# Altium PCB LEDMatrix.PcbDoc
Units mil, origin at the board's own origin, x right, y up, seen from the top; angles counter-clockwise.
Board outline 6710 x 1575.53 mil, 2 copper layers (Top Layer, Bottom Layer); 42 components, 138 nets, 415 pads, 163 vias.
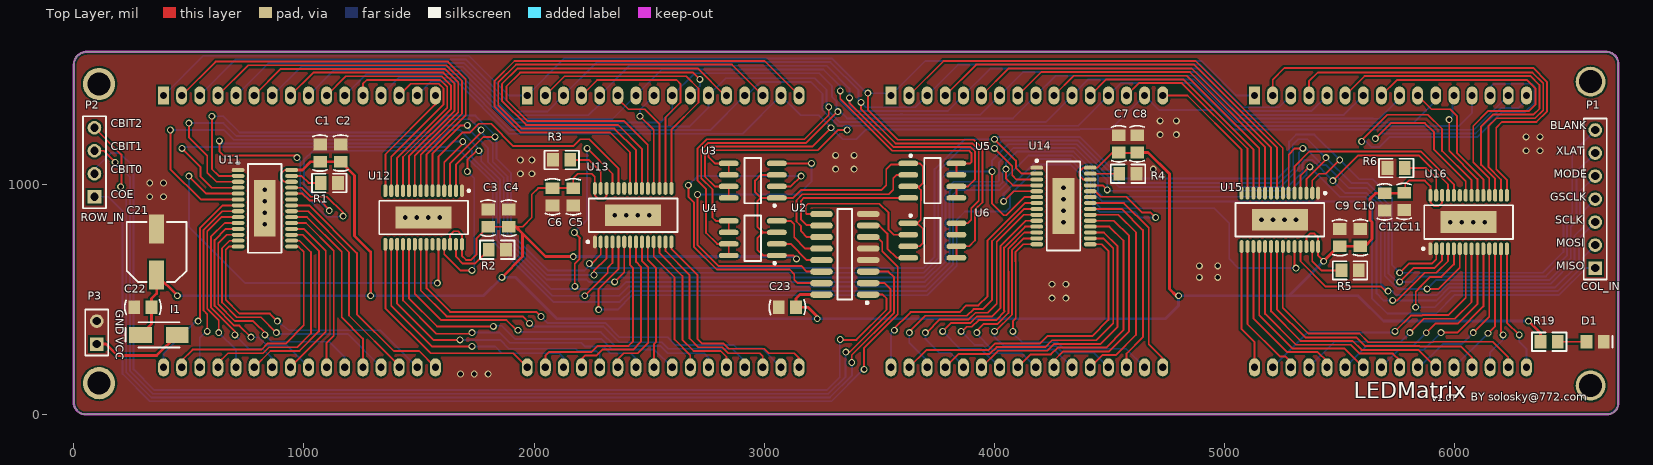
[diagram p0: Top Layer view]
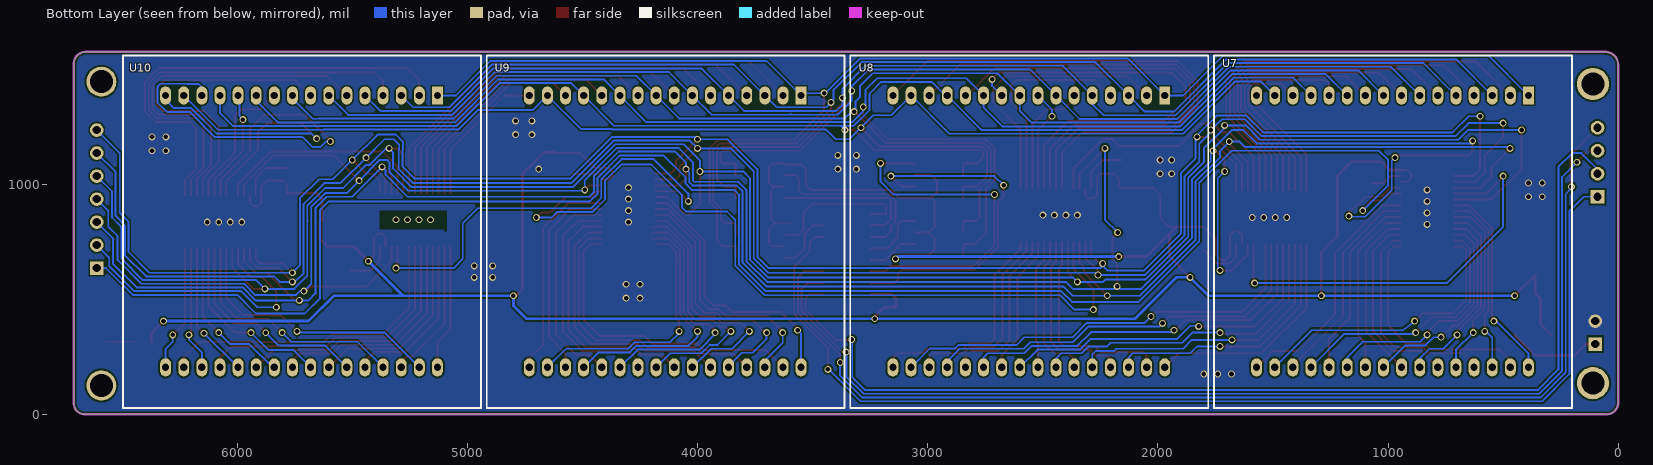
[diagram p1: Bottom Layer view, seen from below]
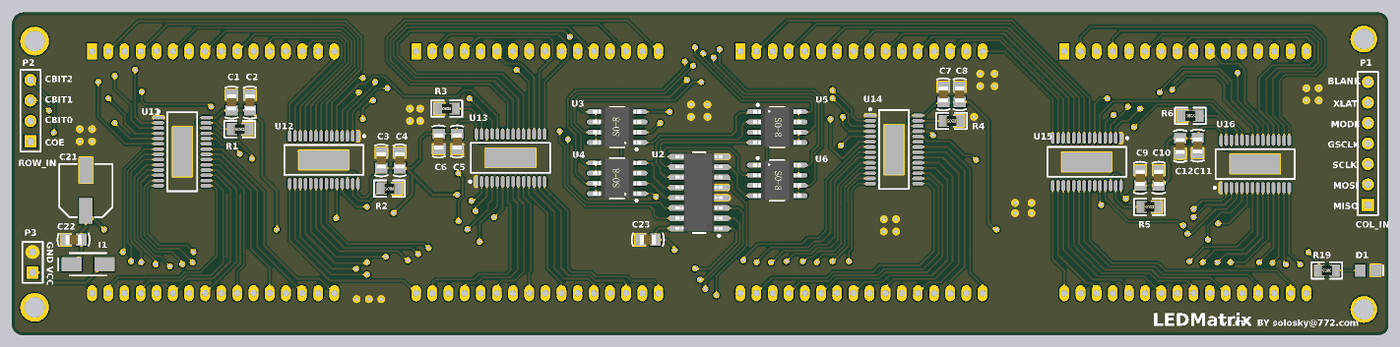
[diagram p2: 3D render of the assembled board from above, using the file's embedded part models]

## Layer stack, top to bottom
Top Solder: solder mask 0.4, Solder Resist, Dk 3.5
Top Layer: signal copper 1.4
Dielectric 1: dielectric 12.6, FR-4, Dk 4.8
Bottom Layer: signal copper 1.4
Bottom Solder: solder mask 0.4, Solder Resist, Dk 3.5

## Board outline
60,0 cw(c52.5,52.5) 0,45 0,1520 cw(c57.5,1517.5) 60,1575 6660,1575 cw(c6657.5,1522.5) 6710,1520 6710,45 cw(c6662.5,47.5) 6660,0

## Design rules (kind name [scope] priority, off if disabled: settings)
Clearance [All] p1: gap=8 except(7: SMDPad-SMDPad)
MinimumSolderMaskSliver [All] p1: minsoldermaskwidth=1
PolygonConnect [All] p1: connectstyle=Direct reliefconductorwidth=10 reliefentries=4 polygonreliefangle="90 Angle" airgapwidth=10
RoutingVias [All] p1: holewidth=20 width=30 viastyle="Through Hole" minholewidth=20 minwidth=30 maxholewidth=20 maxwidth=30
SilkToSilkClearance [All] p1: silktosilkclearance=6
SilkToSolderMaskClearance [IsPad] p1: minsilkscreentomaskgap=5 clearancetoexposedcopper=TRUE
SolderMaskExpansion [All] p1: expansion=4
UnpouredPolygon [All] p1: allowunpoured=FALSE
Width [All] p1: maxlimit=12 minlimit=8 preferedwidth=8
26 further rules are at their usual default settings.

## Components (designator, comment, footprint, x,y, rotation, side; value= is the part's Value field where it differs from the comment)
C1 "Cap" C-0805 1070,1135 r270 top
C2 "Cap" C-0805 1160,1135 r270 top
C3 "Cap" C-0805 1800,852.4 r270 top
C4 "Cap" C-0805 1890,852.4 r270 top
C5 "Cap" C-0805 2170,945 r90 top
C6 "Cap" C-0805 2080,945 r90 top
C7 "Cap" C-0805 4540,1175 r270 top
C8 "Cap" C-0805 4620,1175 r270 top
C9 "Cap" C-0805 5500,767.4 r270 top
C10 "Cap" C-0805 5590,767.4 r270 top
C11 "Cap" C-0805 5780,925 r90 top
C12 "Cap" C-0805 5695,922.6 r90 top
C21 "Cap Pol2" CAPAE-D 360,705 r90 top
C22 "Cap" C-0805 300,465 r180 top
C23 "Cap" C-0805 3100,465 r180 top
D1 "LED2" LED-0805 6610,315 r0 top
I1 "Diode" D-SMA 370,345 r180 top
P1 "COL_IN" HDR1X7 6610,635 r90 top locked
P2 "ROW_IN" HDR1X4 90,945 r90 top locked
P3 "PW_IN" HDR1X2 100,305 r90 top
R1 "Res2" 0805-1 1110,1005 r180 top
R2 "Res2" 0805-1 1840,715 r180 top
R3 "Res2" 0805-1 2120,1105 r0 top
R4 "Res2" 0805-1 4580,1045 r180 top
R5 "Res2" 0805-1 5545,625 r180 top
R6 "Res2" 0805-1 5745,1070 r0 top
R19 "Res2" 0805-1 6410,315 r180 top
U2 "SN74HC138D" SOIC-16 3350,695 r180 top
U3 "APM4953" SOIC-8 2950,1015 r180 top
U4 "APM4953" SOIC-8 2950,765 r180 top
U5 "APM4953" SOIC-8 3730,1015 r0 top
U6 "APM4953" SOIC-8 3730,755 r0 top
U7 "LEDARRAY_RGB" DIP32 390,1385 r270 bottom locked
U8 "LEDARRAY_RGB" DIP32 1970,1385 r270 bottom locked
U9 "LEDARRAY_RGB" DIP32 3550,1385 r270 bottom locked
U10 "LEDARRAY_RGB" DIP32 5130,1385 r270 bottom locked
U11 "TLC5941" TSOP28_N 830,895 r0 top
U12 "TLC5941" TSOP28_N 1520,855 r270 top
U13 "TLC5941" TSOP28_N 2430,865 r90 top
U14 "TLC5941" TSOP28_N 4300,905 r0 top
U15 "TLC5941" TSOP28_N 5240,845 r270 top
U16 "TLC5941" TSOP28_N 6060,835 r90 top

## Footprints (in the part's own frame and the unit in brackets; to place one, negate y for a bottom-side part, rotate by r counter-clockwise, add the part's x,y. Pads: shape width x height; smd on the part's side, far side on the other; paste and mask are expansions set on the pad)
0805-1 [mm] "0805带丝印"
  rect 1.3x1.5 smd: 1(-0.95,0) 2(0.95,0)
  silkscreen extent -1.91,-1.02 1.91,1.02, body extent -1,-0.62 1,0.63, height 0.5
C-0805 [mm] "贴片电容"
  rect 1.3x1.5 smd: 1(-0.95,0) 2(0.95,0)
  silkscreen extent -2,-0.79 2,0.79, body extent -1,-0.6 1,0.6, height 0.95
CAPAE-D [mm] "Aluminum Electrolytic Capacitor, Body 6.60x6.60x5.50mm, IPC Medium Density"
  rect 3.2x1.65 smd: 1(-2.525,0) 2(2.525,0)
  silkscreen extent -3.3,-3.3 3.3,3.3, body extent -3.3,-3.3 3.3,3.3, height 5.5
D-SMA [mm] "贴片二极管"
  rect 2.5x1.75 smd: 1(-2.032,0) 2(2.032,0)
  silkscreen extent -2.29,-1.4 3.68,1.4
DIP32 [mm]
  rect 2x1.2 hole 0.8: 1(0,0)
  oval 2x1.2 hole 0.8: 2(0,-2) 3(0,-4) 4(0,-6) 5(0,-8) 6(0,-10) 7(0,-12) 8(0,-14) 9(0,-16) 10(0,-18) 11(0,-20) 12(0,-22) 13(0,-24) 14(0,-26) 15(0,-28) 16(0,-30) 17(30,-30) 18(30,-28) 19(30,-26) 20(30,-24) 21(30,-22) 22(30,-20) 23(30,-18) 24(30,-16) 25(30,-14) 26(30,-12) 27(30,-10) 28(30,-8) 29(30,-6) 30(30,-4) 31(30,-2) 32(30,0)
  silkscreen extent -4.4,-34.7 34.5,4.8
HDR1X2 [mm] "Connector; Header; 2 Position"
  rect 1.5x1.5 hole 0.9: 1(0,0)
  round 1.5 hole 0.9: 2(2.54,0)
  silkscreen extent -1.27,-1.27 3.81,1.27
HDR1X4 [mm] "Connector; Header; 4 Position"
  rect 1.5x1.5 hole 0.9: 1(0,0)
  round 1.5 hole 0.9: 2(2.54,0) 3(5.08,0) 4(7.62,0)
  silkscreen extent -1.27,-1.27 8.89,1.27
HDR1X7 [mm] "Connector; Header; 7 Position"
  rect 1.5x1.5 hole 0.9: 1(0,0)
  round 1.5 hole 0.9: 2(2.54,0) 3(5.08,0) 4(7.62,0) 5(10.16,0) 6(12.7,0) 7(15.24,0)
  silkscreen extent -1.27,-1.27 16.51,1.27
LED-0805 [mm] "贴片LED"
  rect 1.3x1.5 smd: 1(-0.95,0) 2(0.95,0)
  silkscreen extent 1.91,-0.64 1.91,0.64
SOIC-8 [mm]
  oval 2.2x0.6 smd: 1(-2.654,1.905) 2(-2.654,0.635) 3(-2.654,-0.635) 4(-2.654,-1.905) 5(2.654,-1.905) 6(2.654,-0.635) 7(2.654,0.635) 8(2.654,1.905)
  silkscreen extent -2.53,-2.5 0.9,2.88, body extent -3,-2.45 3,2.45, height 1.7
SOIC-16 [mm]
  oval 2.5x0.7 smd: 1(-2.577,4.445) 2(-2.577,3.175) 3(-2.577,1.905) 4(-2.577,0.635) 5(-2.577,-0.635) 6(-2.577,-1.905) 7(-2.577,-3.175) 8(-2.577,-4.445) 9(2.577,-4.445) 10(2.577,-3.175) 11(2.577,-1.905) 12(2.577,-0.635) 13(2.577,0.635) 14(2.577,1.905) 15(2.577,3.175) 16(2.577,4.445)
  silkscreen extent -2.58,-5 0.8,5.47, body extent -2.88,-4.92 2.92,4.88, height 1.75
TSOP28_N [mm] "TSOP, 28-Leads, Body 9.70x4.40mm, Pitch 0.65mm, Thermal Pad 6.20x2.40mm, IPC Medium Density"
  oval 1.4x0.45 smd: 1(-2.95,4.225) 2(-2.95,3.575) 3(-2.95,2.925) 4(-2.95,2.275) 5(-2.95,1.625) 6(-2.95,0.975) 7(-2.95,0.325) 8(-2.95,-0.325) 9(-2.95,-0.975) 10(-2.95,-1.625) 11(-2.95,-2.275) 12(-2.95,-2.925) 13(-2.95,-3.575) 14(-2.95,-4.225) 15(2.95,-4.225) 16(2.95,-3.575) 17(2.95,-2.925) 18(2.95,-2.275) 19(2.95,-1.625) 20(2.95,-0.975) 21(2.95,-0.325) 22(2.95,0.325) 23(2.95,0.975) 24(2.95,1.625) 25(2.95,2.275) 26(2.95,2.925) 27(2.95,3.575) 28(2.95,4.225)
  rect 2.4x6.2 smd: 29(0,0)
  silkscreen extent -3.07,-4.9 1.85,5.12, body extent -2.25,-4.9 2.25,4.9, height 1.2

## Part data
C1 C2 C3 C4 C5 C6 C7 C8 C9 C10 C11 C12 C22 C23: "Capacitor"
C21: "Polarized Capacitor (Axial)"
D1: "Typical RED, GREEN, YELLOW, AMBER GaAs LED"
I1: "Default Diode"
P1: library part "Header 7", "Header, 7-Pin"
P2: library part "Header 4", "Header, 4-Pin"
P3: library part "Header 2", "Header, 2-Pin"
R1 R2 R3 R4 R5 R6 R19: "Resistor"
U2: "3-Line to 8-Line Decoder / Demultiplexer"

## Free pads (board coordinates)
  round 140 hole 100: 1(110,1435) 3(110,135)
  round 130 hole 100: 2(6590,1445) 4(6590,125)

## Via types
v1: diameter 30, hole 20, Top Layer to Bottom Layer, 163 vias

## Nets (pads, with @x,y where several pads share a name; then routed paths per layer and width w, separated by ;. In a path a pad name is that pad's centre, name@x,y a point inside that pad or via, vN(x,y) a via of type N, cw(c..) or ccw(c..) an arc to the next point about the centre after c; other vN are vias at no path point)
BA_1: U7.2 U12.7 | length 1881.5
  Top Layer w8: U7.2 616.11,1532.37 1625.62,1532.37 1702.72,1455.27 1702.72,1299.59 1532.8,1129.66 U12.7
BA_2: U7.4 U12.8 | length 1694.8
  Top Layer w8: U7.4 757.59,1516.37 1619,1516.37 1686.72,1448.64 1686.72,1306.22 1507.2,1126.7 U12.8
BA_3: U7.6 U12.9 | length 1508.2
  Top Layer w8: U7.6 899.07,1500.37 1612.37,1500.37 1670.72,1442.01 1670.72,1312.84 1481.61,1123.73 U12.9
BA_4: U7.8 U12.10 | length 1321.5
  Top Layer w8: U7.8 1040.55,1484.37 1605.74,1484.37 1654.72,1435.39 1654.72,1319.47 1456.02,1120.77 U12.10
BA_5: U7.10 U12.11 | length 1134.9
  Top Layer w8: U7.10 1182.03,1468.37 1599.11,1468.37 1638.72,1428.76 1638.72,1326.1 1430.43,1117.81 U12.11
BA_6: U7.12 U12.12 | length 978.1
  Top Layer w8: U7.12 1256.14,1435.88 1272.63,1452.37 1592.49,1452.37 1622.72,1422.13 1622.72,1332.73 1404.84,1114.84 U12.12
BA_7: U7.14 U12.13 | length 761.6
  Top Layer w8: U12.13 1379.25,1119.25 1606.72,1346.73 1606.72,1415.5 1585.86,1436.37 1464.99,1436.37 U7.14
BA_8: U7.16 U12.14 | length 503.9
  Top Layer w8: U12.14 1353.66,1128.66 1571.1,1346.1 U7.16
BB_1: U8.2 U13.15 | length 1205.2
  Top Layer w8: U8.2 2132.11,1468.37 2661.42,1468.37 2714.28,1415.5 2714.28,1354.5 2596.34,1236.55 U13.15
BB_2: U8.4 U13.16 | length 945.9
  Top Layer w8: U8.4 2273.59,1452.37 2619.54,1452.37 2635.54,1436.37 2635.54,1354.5 2570.75,1289.7 U13.16
BB_3: U8.6 U13.17 | length 520
  Top Layer w8: U8.6 2363.7,1371.3 2410,1325 2480,1325 2545.16,1259.84 U13.17
BB_4: U8.8 U13.18 | length 453.9
  Top Layer w8: v1(2460,1295) 2519.57,1235.43 U13.18
  Bottom Layer w8: v1(2460,1295) 2460,1323.82 U8.8
BB_5: U8.10 U13.19 | length 1908
  Top Layer w8: U13.19 2493.98,1170.83 2390,1274.8 1970.2,1274.8 1880,1365 1880,1425 1939.37,1484.37 2690.63,1484.37 v1(2720,1455)
  Bottom Layer w8: U8.10 2720,1426.34 v1(2720,1455)
BB_6: U8.12 U13.20 | length 1992.8
  Top Layer w8: U13.20 2468.39,1152.98 2364.37,1257 1965.37,1257 1860,1362.37 1860,1435 1928,1503 2710.18,1503 2828.18,1385 U8.12
BB_7: U8.14 U13.21 | length 2181.3
  Top Layer w8: U13.21 2442.8,1147.07 2348.87,1241 1946.63,1241 1844,1343.63 1844,1441.63 1921.37,1519 2859.62,1519 U8.14
BB_8: U8.16 U13.22 | length 2360.6
  Top Layer w8: U13.22 2417.2,1137.4 2329.61,1225 1940,1225 1828,1337 1828,1448.25 1914.75,1535 3001.1,1535 U8.16
BC_1: U9.2 U15.7 | length 2038.6
  Top Layer w8: U9.2 3778.74,1535 4874.71,1535 5252.8,1156.91 U15.7
BC_2: U9.4 U15.8 | length 1844
  Top Layer w8: U9.4 3920.22,1519 4868.08,1519 5227.2,1159.88 U15.8
BC_3: U9.6 U15.9 | length 1646.2
  Top Layer w8: U9.6 4061.7,1503 4856,1503 5201.61,1157.39 U15.9
BC_4: U9.8 U15.10 | length 1451.6
  Top Layer w8: U9.8 4203.18,1487 4849.37,1487 5176.02,1160.35 U15.10
BC_5: U9.10 U15.11 | length 1253.1
  Top Layer w8: U9.10 4344.66,1471 4836,1471 5150.43,1156.57 U15.11
BC_6: U9.12 U15.12 | length 1053.6
  Top Layer w8: U9.12 4486.14,1455 4821,1455 5124.84,1151.16 U15.12
BC_7: U9.14 U15.13 | length 859
  Top Layer w8: U9.14 4627.62,1439 4814.37,1439 5099.25,1154.12 U15.13
BC_8: U9.16 U15.14 | length 628.8
  Top Layer w8: U9.16 4838.66,1385 5073.66,1150 U15.14
BD_1: U10.2 U16.15 | length 1998
  Top Layer w8: U10.2 5208.74,1453.74 5260,1505 6340,1505 6400,1445 6400,1315 6355,1270 6205,1270 6180.2,1245.2 6180.2,1064.8 6226.34,1018.66 U16.15
BD_2: U10.4 U16.16 | length 1821
  Top Layer w8: U10.4 5366.22,1446.22 5405,1485 6337.37,1485 6384,1438.37 6384,1321.63 6348.37,1286 6181.13,1286 6145.75,1250.62 6145.75,1074.51 6200.75,1019.51 U16.16
BD_3: U10.6 U16.17 | length 1607.6
  Top Layer w8: U10.6 5607.7,1469 6329,1469 6368,1430 6368,1328.25 6341.75,1302 6165.63,1302 6114.25,1250.62 6114.25,1083.38 6175.16,1022.47 U16.17
BD_4: U10.8 U16.18 | length 1422.3
  Top Layer w8: U10.8 5749.18,1453 6313.27,1453 6350,1416.27 6350,1345 6323,1318 6145.22,1318 6079.8,1252.59 6079.8,1095.2 6149.57,1025.43 U16.18
BD_5: U10.10 U16.19 | length 599.6
  Top Layer w8: U10.10 5898.66,1325 5979.8,1325 6010.2,1294.61 6010.2,1134.8 6123.98,1021.02 U16.19
BD_6: U10.12 U16.20 | length 494.2
  Top Layer w8: v1@5975.75,1280.75 5975.75,1144.57 6098.39,1021.93 U16.20
  Bottom Layer w8: v1(5975,1280) 5990,1295 5990,1378.86 U10.12
BD_7: U10.14 U16.21 | length 1927.7
  Top Layer w8: v1(5595,1185) 5590,1185 5706.63,1301.63 5883.37,1301.63 5944.25,1240.75 5944.25,1144.57 6072.8,1016.02 U16.21
  Bottom Layer w8: v1(5595,1185) 5615.35,1185 5639.67,1160.67 5671.67,1160.67 5715,1204 6096.62,1204 6206.62,1314 6306.23,1314 6346.73,1354.5 6346.73,1423.27 6333.63,1436.37 6217.61,1436.37 6216.24,1435 6167.09,1435 6153.62,1421.53 U10.14
BD_8: U10.16 U16.22 | length 1374.9
  Top Layer w8: v1(5655,1197.67) 5722.33,1265 5870,1265 5909.8,1225.2 5909.8,1150.2 6047.2,1012.8 U16.22
  Bottom Layer w8: v1(5655,1197.67) 5677.33,1220 6089.99,1220 6199.99,1330 6275,1330 6311.1,1366.1 U10.16
BLANK: P1.7 U11.2 U12.2 U13.2 U14.2 U15.2 U16.2 | length 9665
  Top Layer w8: v1(600,1295) 600,1065.75 630,1035.75 U11.2 ; U12.2 1660.75,1085.75 1780,1205 v1(1830,1205) ; v1(2240,655) 2250,655 2289.25,694.25 U13.2 ; v1(4000,1195) 4093,1102 4093,1071.25 4118.5,1045.75 U14.2 ; U15.2 5380.75,1015.75 5410,1045 5440,1045 v1(5500,1105) ; v1(5760,615) 5800,655 5900,655 5919.25,674.25 U16.2
  Bottom Layer w8: v1(600,1295) 650,1295 720,1225 1543.37,1225 1616.37,1298 1745.18,1298 1830,1213.18 v1(1830,1205) 1830,1195 1836,1189 1836,1111.63 1900,1047.63 1900,785 2060,625 2220,625 2240,645 2250,635 3690,635 3740,685 3740,1065 3870,1195 v1(4000,1195) 4010,1205 4370,1205 4550,1025 5230,1025 5282,1077 5282,1145.19 5280,1147.19 5280,1185 5310,1215 5390,1215 v1(5500,1105) 5584,1021 5644,1021 5727.31,937.69 5727.31,647.69 v1(5760,615) 6382,615 6472,705 6472,837 6510,875 6510,1135 P1.7
C1: U3.7 U3.8 U7.15 U8.15 U9.15 U10.15 | length 6085.6
  Top Layer w8: U3.8 U3.7 2785,990 2742,1033 2742,1141.75 2763.25,1163 3208,1163 3280,1235 v1@3280,1255
  Bottom Layer w8: U7.15 1553.36,1446 1663.24,1446 1890.24,1219 2906.36,1219 U8.15 3158.36,1299 3236,1299 v1(3290,1245) 3340,1195 3399.74,1195 3442.37,1237.63 4370.14,1237.63 4372.51,1240 4507.36,1240 U9.15 4715.75,1321.61 4955,1321.61 5039.61,1237 5625.33,1237 5626.33,1236 6083.36,1236 U10.15
C2: U3.5 U3.6 U7.13 U8.13 U9.13 U10.13 | length 6162.7
  Top Layer w8: U3.6 U3.5 2785,1090 2758,1117 2758,1135.12 2769.88,1147 3232,1147 3320,1235 v1(3360,1235)
  Bottom Layer w8: U7.13 1411.88,1462 1669.86,1462 1896.86,1235 2764.88,1235 U8.13 2923,1385 2982,1444 3201,1444 3253,1392 3253,1321.19 3320.56,1253.63 3378.63,1253.63 ; v1(3360,1235) 3378.63,1253.63 ; U10.13 6074.88,1309.88 6017,1252 5632.95,1252 5631.95,1253 5046.24,1253 4860.24,1439 4548.88,1439 U9.13 4363.51,1253.63 3378.63,1253.63
C3: U4.7 U4.8 U7.11 U8.11 U9.11 U10.11 | length 6549.1
  Top Layer w8: U4.8 U4.7 2795,740 2747.37,787.63 2747.37,977.63 2710,1015 2710,1155 2750,1195 3174.75,1195 3280,1300.25 v1(3280,1335)
  Bottom Layer w8: U7.11 1270.4,1478 1676.49,1478 1903.49,1251 2676,1251 2757.4,1332.4 U8.11 2832.4,1460 3220,1460 3270.25,1409.75 3270.25,1344.75 v1(3280,1335) 3280,1316.82 3327.19,1269.63 4222.03,1269.63 U9.11 4407.4,1455 4866.86,1455 5052.86,1269 5638.58,1269 5639.58,1268 5823,1268 5917.4,1362.4 U10.11
C4: U4.5 U4.6 U7.9 U8.9 U9.9 U10.9 | length 6444.7
  Top Layer w8: U4.6 U4.5 2790,840 2775,855 2775,977.37 2726,1026.37 2726,1148.37 2756.63,1179 3181.37,1179 3317.37,1315 v1(3320,1315)
  Bottom Layer w8: U7.9 1128.92,1494 1683.12,1494 1910.12,1267 2548.05,1267 2599.92,1318.88 U8.9 2696.92,1482 3238,1482 3294.49,1425.51 3294.49,1377.75 3314,1358.25 3314,1321 v1(3320,1315) 3330.63,1315 3360,1285.63 4080.55,1285.63 U9.9 4265.92,1471 4873.49,1471 5059.49,1285 5645.21,1285 5646.21,1284 5671,1284 5759.92,1372.92 U10.9
C5: U5.7 U5.8 U7.7 U8.7 U9.7 U10.7 | length 6140.7
  Top Layer w8: v1(3330,1405) 3330,1371.75 3556.75,1145 3890,1145 3900,1135 3900,1095 3895,1090 U5.8 U5.7
  Bottom Layer w8: U7.7 987.44,1510 1689.75,1510 1916.75,1283 2340.44,1283 U8.7 2555.44,1498 3257,1498 3330,1425 v1(3330,1405) 3330,1362.37 3390.74,1301.63 3591.85,1301.63 3592.22,1302 3600.36,1302 3600.73,1301.63 3939.07,1301.63 U9.7 4124.44,1487 4880.12,1487 5066.12,1301 5518.44,1301 U10.7
C6: U5.5 U5.6 U7.5 U8.5 U9.5 U10.5 | length 6227.6
  Top Layer w8: v1(3370,1375) 3370,1354.37 3563.37,1161 3896.63,1161 3916,1141.63 3916,1021 3885,990 U5.6 U5.5
  Bottom Layer w8: U7.5 845.96,1526 1696.37,1526 1923.37,1299 2236,1299 2284.96,1347.96 U8.5 2413.96,1514 3271,1514 3370,1415 v1(3370,1375) 3370,1345 3397.37,1317.63 3585.22,1317.63 3585.59,1318 3606.99,1318 3607.36,1317.63 3797.59,1317.63 U9.5 3982.96,1503 4886.75,1503 5072.75,1317 5376.96,1317 U10.5
C7: U6.7 U6.8 U7.3 U8.3 U9.3 U10.3 | length 6321.1
  Top Layer w8: v1(3420,1355) 3420,1327 3570,1177 3903.25,1177 3932,1148.25 3932,927.51 3899,894.51 3899,845 3884,830 U6.8 U6.7
  Bottom Layer w8: U7.3 704.48,1542 1703,1542 1930,1315 2057.48,1315 U8.3 2272.48,1530 3287.37,1530 3410,1407.37 3410,1365 v1(3420,1355) 3441.37,1333.63 3578.59,1333.63 3578.96,1334 3613.62,1334 3613.99,1333.63 3656.11,1333.63 U9.3 3841.48,1519 4893.37,1519 5078.74,1333.63 5158.59,1333.63 5236.11,1333.63 U10.3
C8: U6.5 U6.6 U7.1 U8.1 U9.1 U10.1 | length 6333.5
  Top Layer w8: v1(3450,1395) 3450,1323 3580,1193 3909.88,1193 3948,1154.88 3948,920.88 3915,887.88 3915,755 3890,730 U6.6 U6.5
  Bottom Layer w8: U7.1 563,1558 1717,1558 1890,1385 U8.1 2131,1546 3294,1546 v1@3447.5,1392.5 ; v1(3450,1395) 3540,1395 U9.1 3700,1535 4900,1535 5050,1385 U10.1
C_BIT0: P2.2 U2.1 | length 4809.8
  Top Layer w8: v1(3330,325) 3332.12,322.88 3400,322.88 3531.06,453.94 3531.06,503.94 3515,520 U2.1
  Bottom Layer w8: P2.2 90,1065 160,1135 200,1135 260,1075 260,195 350,105 3272.12,105 3327.72,160.61 3327.72,259.09 3327.59,259.22 3327.59,322.59 v1(3330,325)
C_BIT1: P2.3 U2.2 | length 4803.3
  Top Layer w8: P2.3 130,1145 v1(180,1095) ; v1(3354.59,270.41) 3370.15,270.41 3548,448.25 3548,545 3523,570 U2.2
  Bottom Layer w8: v1(180,1095) 244,1031 244,188.37 343.37,89 3278.75,89 3353,163.25 3353,268.81 v1(3354.59,270.41)
C_BIT2: P2.4 U2.3 | length 4987.3
  Top Layer w8: P2.4 207,1128 207,992 v1(203.5,988.5) ; v1(3380,225) 3380,257.63 3564,441.63 3564,595 3539,620 U2.3
  Bottom Layer w8: v1(203.5,988.5) 203.5,981.5 228,957 228,181.75 336.75,73 3285.37,73 3381.46,169.09 3381.46,223.54 v1(3380,225)
C_OE: P2.1 U2.6 | length 4894.6
  Top Layer w8: v1(3433.45,195) 3433.45,288.45 3580,435 3580,641.46 3512.67,708.79 3512.67,747.33 3490,770 U2.6
  Bottom Layer w8: P2.1 150,945 212,883 212,175.12 330.12,57 3292,57 3430,195 v1(3433.45,195)
GA_1: U7.31 U11.15 | length 1005.4
  Top Layer w8: U7.31 468.74,233.74 516,281 815.55,281 841.55,307 920,307 999,386 999,706 976.34,728.66 U11.15
GA_2: U7.29 U11.16 | length 933.1
  Top Layer w8: U7.29 626.22,221.22 670,265 822.18,265 848.18,291 970,291 1030,351 1030,705 980.75,754.25 U11.16
GA_3: U7.27 U11.17 | length 843.7
  Top Layer w8: U7.27 854.8,275 980,275 1065,360 1065,710 995.16,779.84 U11.17
GA_4: U7.25 U11.18 | length 758.2
  Top Layer w8: U7.25 1095,357.72 1095,710 999.57,805.43 U11.18
GA_5: U7.23 U11.19 | length 752.9
  Top Layer w8: U11.19 1008.98,831.02 1129.8,710.2 1129.8,341.14 1098.66,310 U7.23
GA_6: U7.21 U11.20 | length 820.5
  Top Layer w8: U11.20 1013.39,856.61 1164.25,705.75 1164.25,420.75 1256.14,328.86 U7.21
GA_7: U7.19 U11.21 | length 913.9
  Top Layer w8: U11.21 1017.8,882.2 1195.75,704.25 1195.75,429.25 1413.62,211.38 U7.19
GA_8: U7.17 U11.22 | length 1071.9
  Top Layer w8: U11.22 1022.46,907.8 1230.2,700.06 1230.2,434.8 1390,275 1500,275 U7.17
GB_1: U8.31 U13.7 | length 894.3
  Top Layer w8: U8.31 2048.74,253.74 2066,271 2250,271 2276,297 2410,297 2429.8,316.8 2429.8,575 2429.8,635.2 2417.2,647.8 U13.7
GB_2: U8.29 U13.8 | length 768.5
  Top Layer w8: U8.29 2206.22,241.22 2220,255 2269.94,255 2295.94,281 2430,281 2464.25,315.25 2464.25,555 2464.25,640.75 2442.8,662.2 U13.8
GB_3: U8.27 U13.9 | length 646.1
  Top Layer w8: U8.27 2363.7,238.7 2390,265 2450,265 2495.75,310.75 2495.75,639.25 2468.39,666.61 U13.9
GB_4: U8.25 U13.10 | length 563.7
  Top Layer w8: U13.10 2493.98,671.02 2530.2,634.8 2530.2,315.2 2521.18,306.18 U8.25
GB_5: U8.23 U13.11 | length 610.9
  Top Layer w8: U13.11 2519.57,685.43 2609.8,595.2 2609.8,325.2 2678.66,256.34 U8.23
GB_6: U8.21 U13.12 | length 734.2
  Top Layer w8: U13.12 2545.16,699.84 2644.25,600.75 2644.25,323.38 2692.63,275 2810,275 2836.14,248.86 U8.21
GB_7: U8.19 U13.13 | length 860.7
  Top Layer w8: U13.13 2570.75,710 2675.75,605 2675.75,575 2675.75,329.25 2714,291 2816.63,291 2842.63,265 2980,265 2993.62,251.38 U8.19
GB_8: U8.17 U13.14 | length 984.5
  Top Layer w8: U13.14 2596.34,718.66 2710.2,604.8 2710.2,455 2710.2,326.8 2730,307 2823.25,307 2845.25,285 3000,285 3020,265 3130,265 3151.1,243.9 U8.17
GC_1: U9.31 U14.15 | length 1342.4
  Top Layer w8: U9.31 3703.52,278.68 3973.23,278.68 4002.55,308 4198,308 4230,340 4425,340 4495,410 4495,710 4466.34,738.66 U14.15
GC_2: U9.29 U14.16 | length 1252.5
  Top Layer w8: U9.29 3845,262.68 3979.85,262.68 4009.18,292 4220,292 4250,322 4442,322 4516,396 4516,721.63 4473.38,764.25 U14.16
GC_3: U9.27 U14.17 | length 1157.9
  Top Layer w8: U9.27 4015.8,276 4230,276 4260,306 4461,306 4535,380 4535,730 4475.16,789.84 U14.17
GC_4: U9.25 U14.18 | length 1084.4
  Top Layer w8: U9.25 4157.28,260 4245,260 4275,290 4485,290 4560,365 4560,755 4499.57,815.43 U14.18
GC_5: U9.23 U14.19 | length 1019.6
  Top Layer w8: U9.23 4258.66,233.66 4298,273 4498,273 4585,360 4585,775 4518.98,841.02 U14.19
GC_6: U9.21 U14.20 | length 932.9
  Top Layer w8: U9.21 4469.24,257 4527,257 4615,345 4615,790 4538.39,866.61 U14.20
GC_7: U9.19 U14.21 | length 893
  Top Layer w8: U14.21 4552.8,892.2 4645,800 4645,335 4573.62,263.62 U9.19 U9.19@4573.9,203.9
GC_8: U9.17 U14.22 | length 929.9
  Top Layer w8: U14.22 4562.2,917.8 4670,810 4670,305 4731.1,243.9 U9.17
GD_1: U10.31 U16.7 | length 1164
  Top Layer w8: v1(5740,360) 5740,359.76 5809.8,429.57 5856.94,429.57 5858.37,431 5971,431 6047.2,507.2 U16.7
  Bottom Layer w8: U10.31 5359.84,355 v1@5730,355
GD_2: U10.29 U16.8 | length 1055.2
  Top Layer w8: v1(5805,355) 5865,415 6000,415 6072.8,487.8 U16.8
  Bottom Layer w8: U10.29 5477.32,315 5765,315 v1(5805,355)
GD_3: U10.27 U16.9 | length 928.9
  Top Layer w8: v1(5875.75,354.25) 5916.5,395 6015,395 6098.39,478.39 U16.9
  Bottom Layer w8: U10.27 5618.8,299 5811.63,299 5812.63,300 5821.5,300 v1(5875.75,354.25)
GD_4: U10.25 U16.10 | length 802.6
  Top Layer w8: v1(5940,355) 6010.2,355 6123.98,468.78 U16.10
  Bottom Layer w8: U10.25 5757.28,280 5865,280 v1(5940,355)
GD_5: U10.23 U16.11 | length 700
  Top Layer w8: v1(6080,355) 6149.57,424.57 U16.11 U16.11@6144.83,714.13
  Bottom Layer w8: U10.23 5846.22,203.9 5947.33,305 6030,305 v1@6077.67,352.67
GD_6: U10.21 U16.12 | length 589.2
  Top Layer w8: v1(6144.33,352) 6175.16,382.83 U16.12
  Bottom Layer w8: U10.21 5996.22,203.9 v1(6144.33,352)
GD_7: U10.19 U16.13 | length 542.1
  Top Layer w8: U16.13 6200.75,354.25 v1(6210,345)
  Bottom Layer w8: U10.19 6153.62,268.62 6210,325 v1(6210,345)
GD_8: U10.17 U16.14 | length 550.1
  Top Layer w8: U16.14 6226.34,398.66 v1(6280,345)
  Bottom Layer w8: v1(6280,345) 6280,315 6311.1,283.9 U10.17
GND: C1.1 C2.1 C3.1 C4.1 C5.1 C6.1 C7.1 C8.1 C9.1 C10.1 C11.1 C12.1 C21.2 C22.2 C23.2 D1.2 P3.2 R1.1 R2.1 R3.1 R4.1 R5.1 R6.1 U2.4 U2.5 U2.8 U11.1 U11.29 U12.1 U12.29 U13.1 U13.29 U14.1 U14.29 U15.1 U15.29 U16.1 U16.29
  other v1: 1680,175 1740,175 1800,175 4250,505 4310,505 4250,565 4310,565 4890,595 4970,595 4890,645 4970,645 830,825 4300,835 5980,835 6030,835 6080,835 6130,835 5160,845 5210,845 5260,845 5310,845 1440,855 1490,855 1540,855 1590,855 2350,865 2400,865 2450,865 2500,865 830,875 4300,885 830,925 4300,935 330,945 390,945 830,975 4300,985 330,1005 390,1005 1940,1045 1990,1045 3310,1065 3390,1065 4690,1065 1940,1105 1990,1105 3310,1125 3390,1125 6310,1145 6370,1145 6310,1205 6370,1205 4720,1215 4790,1215 4720,1275 4790,1275
GSCLK: P1.4 U11.25 U12.25 U13.25 U14.25 U15.25 U16.25 | length 11742.3
  Top Layer w8: v1(632.82,1188) 632.82,1142.18 650,1125 960,1125 v1(970,1115) ; U11.25 990.43,984.57 1030,945 1100,945 1170,875 v1(1170,861) ; U12.25 1609.57,695.43 1680,625 v1(1730,625) ; v1(1710,1055) 1710,1105 1750,1145 v1(1760,1145) ; v1(2175,790) 2200,765 2197,762 2197,673.82 2176.75,653.57 v1(2176.75,556.03) ; v1(2230,1155) 2340.43,1044.57 U13.25 ; U14.25 4470.43,994.57 v1(4490,975) ; U15.25 5329.57,665.43 5440,555 5680,555 5700,535 v1(5710,535) ; v1(5470,1015) 5580,1125 5844,1125 5970.43,998.57 U16.25
  Bottom Layer w8: v1@640,1177 1570,1177 1628,1235 1678.18,1235 1760,1153.18 v1(1760,1145) 1770,1135 1770,1100.25 1852,1018.25 1852,765.12 2072.12,545 2165.73,545 v1(2176.75,556.03) 2187.78,545 2370,545 2400,575 3697.88,575 3788,665.12 3788,975 3823,1010 4015,1010 4020,1015 4020,1095 4082,1157 4350.12,1157 4490,1017.12 v1(4490,975) 4494,971 5256,971 5339,1054 5339,1095 5349,1105 5380,1105 v1(5470,1015) 5524,961 5617.74,961 5677.94,900.8 5677.94,567.06 v1(5710,535) 5728.18,535 5745.18,518 5921,518 5970,567 6416,567 6520,671 6520,775 6560,815 6560,885 P1.4 ; v1(970,1115) 984,1101 984,972.82 1098.82,858 1167,858 v1(1170,861) ; v1(1710,1055) 1740,1025 1740,635 v1(1730,625) ; v1(2175,790) 2230,845 v1(2230,1155)
MISO: P1.1 U11.24 | length 7597.9
  Top Layer w8: U11.24 993.4,958.98 1023.37,929 1070,929 1110,889 v1(1110,885)
  Bottom Layer w8: v1(1110,885) 1000,995 1000,1105 1040,1145 1680,1145 1820,1005 1820,751.86 2083.86,488 2373,488 2420,535 3703.14,535 3820,651.86 3820,955 3840,975 4025.25,975 4052,1001.75 4052,1028.82 4148.18,1125 4336.86,1125 4434,1027.86 4434,958.37 4467.37,925 5603.06,925 5640,888.06 5640,505 5707,438 5919,438 6000,519 6454,519 6570,635 P1.1
MODE: P1.5 U11.6 U12.6 U13.6 U14.6 U15.6 U16.6 | length 10121.3
  Top Layer w8: v1(420,1235) 420,1065 551.61,933.39 U11.6 ; U12.6 1558.39,1132.62 1680.76,1255 v1(1710,1255) ; v1(2350,575) 2391.61,616.61 U13.6 ; v1(3990,1055) 3990,915 4040,865 4051.61,865 4130,943.39 U14.6 ; U15.6 5278.39,1128.39 5305,1155 v1(5340,1155) ; v1(5880,545) 5930,545 6021.61,636.61 U16.6
  Bottom Layer w8: v1(420,1235) 654,1235 696,1193 1556.63,1193 1618.63,1255 v1(1710,1255) 1710,1245 1800,1155 1800,1095 1868,1027 1868,771.75 2054.75,585 2228.18,585 2239.09,574.09 2240,575 v1(2350,575) 2370,595 3695.25,595 3772,671.75 3772,1025 3802,1055 v1(3990,1055) 3990,1103.18 4059.82,1173 4356.75,1173 4542.75,987 5242,987 5323,1068 5323,1138 v1(5340,1155) 5352.63,1155 5424.44,1083.18 5440,1083.18 5540,983.18 5618.18,983.18 5695.31,906.05 5695.31,842.43 5693.94,841.06 5695.31,839.69 5695.31,600.94 5751.25,545 v1(5880,545) 5918,583 6409.37,583 6504,677.63 6504,815 6544,855 6544,969 P1.5
MOSI: P1.2 U16.5 | length 1264.6
  Top Layer w8: v1(5830,465) 5830,532.33 5853,555.33 5853,556.18 5893.82,597 5942,597 5996.02,651.02 U16.5
  Bottom Layer w8: v1(5830,465) 5913.25,465 5983.25,535 6447.37,535 6556,643.63 6556,681 P1.2
NetD1_1: D1.1 R19.1 | length 125.2
  Top Layer w8: R19.1 D1.1
NetI1_1: I1.1 P3.1 | length 408
  Top Layer w12: P3.1 140,305 190,255 360,255 I1.1
NetR1_2: R1.2 U11.27 | length 139.2
  Top Layer w8: U11.27 989.25,1035.75 1020,1005 R1.2
NetR2_2: R2.2 U12.27 | length 233.4
  Top Layer w8: U12.27 1660.75,684.25 1690,655 1742.6,655 R2.2
NetR3_2: R3.2 U13.27 | length 225.3
  Top Layer w8: R3.2 2237.37,1105 2289.25,1053.12 U13.27
NetR4_2: R4.2 U14.27 | length 126.8
  Top Layer w8: U14.27 4416.89,1045 R4.2
NetR5_2: R5.2 U15.27 | length 207.7
  Top Layer w8: U15.27 5380.75,664.25 5420,625 R5.2
NetR6_2: R6.2 U16.27 | length 229.8
  Top Layer w8: R6.2 5875,1070 5919.25,1025.75 U16.27
NetU2_7: U2.7 U6.4 | length 270.1
  Top Layer w8: U2.7 3500,820 3535,785 3535,720 3575,680 U6.4
NetU2_9: U2.9 U6.2 | length 648.6
  Top Layer w8: U2.9 3185,870 3180,875 3180,905 3190,915 3500,915 3540,875 3540,802.63 3562.63,780 U6.2
NetU2_10: U2.10 U5.4 | length 652.2
  Top Layer w8: U2.10 3245.54,823 3182,823 3160,845 3160,927.63 3172.37,940 U5.4
NetU2_11: U2.11 U5.2 | length 803
  Top Layer w8: U2.11 3185,770 3160,795 3160,817.63 3140,837.63 3140,930.25 3165.75,956 3541.51,956 3560.51,975 3560.51,1025.51 3575,1040 U5.2
NetU2_12: U2.12 U4.4 | length 276.9
  Top Layer w8: U4.4 3115,840 3130,825 3130,768.37 3178.37,720 U2.12
NetU2_13: U2.13 U4.2 | length 223.1
  Top Layer w8: U4.2 3115,740 3185,670 U2.13
NetU2_14: U2.14 U3.4 | length 1554.5
  Top Layer w8: v1(2710,955) 2710,735 2800,645 3160,645 3185,620 U2.14 ; U3.4 v1(3205,1090)
  Bottom Layer w8: v1(2710,955) 3150,955 3205,1010 v1(3205,1090)
NetU2_15: U2.15 U3.2 | length 1541.5
  Top Layer w8: v1(2670,995) 2670,945 2694,921 2694,728.37 2793.37,629 3110,629 3130,609 3130,585 3145,570 U2.15 ; U3.2 3115,990 v1(3160,1035)
  Bottom Layer w8: v1(2670,995) 2710,1035 v1(3160,1035)
NetU11_5: U11.5 U12.24 | length 1817.3
  Top Layer w8: v1(500,1035) 576.02,958.98 U11.5 ; v1(1580,570) 1583.98,573.98 U12.24
  Bottom Layer w8: v1(500,1035) 500,815 745,570 v1(1580,570)
NetU12_5: U12.5 U13.24 | length 1181.8
  Top Layer w8: U12.5 1583.98,1118.98 1690,1225 1721.82,1225 1758.82,1262 1813,1262 1910,1165 2170,1165 2200,1195 2240,1195 2366.02,1068.98 U13.24
NetU13_5: U13.5 U14.24 | length 3633.2
  Top Layer w8: v1(2280,455) 2280,545 2366.02,631.02 U13.5 ; U14.24 4438.75,968.98 4462.73,945 4572.63,945 4641.31,876.31 4678.69,876.31 v1(4700,855)
  Bottom Layer w8: v1(2280,455) 2362.63,455 2424.75,517.12 3707.88,517.12 3836,645.24 3836,845 3872,881 4050,881 4067,898 4067,952 4200,1085 4331.61,1085 4402,1014.61 4402,933.12 4456.12,879 4610,879 4634,855 v1(4700,855)
NetU14_5: U14.5 U15.24 | length 1959.4
  Top Layer w8: v1(4040,925) 4083.98,968.98 U14.5 ; U15.24 5303.98,641.02 v1(5310,635)
  Bottom Layer w8: v1(4040,925) 4040,959 4190,1109 4330.24,1109 4418,1021.24 4418,939.75 4462.75,895 4955,895 5020,830 5020,675 5060,635 v1(5310,635)
NetU15_5: U15.5 U16.24 | length 942
  Top Layer w8: U15.5 5303.98,1077.16 5368.82,1142 5853,1142 5996.02,998.98 U16.24
RA_1: U7.32 U11.7 | length 882.8
  Top Layer w8: v1(540,405) 548,413 548,808.25 647.54,907.8 U11.7
  Bottom Layer w8: U7.32 390,265 530,405 v1(540,405)
RA_2: U7.30 U11.8 | length 804
  Top Layer w8: v1(580,360) 580,435 564,451 564,801.63 644.58,882.2 U11.8
  Bottom Layer w8: U7.30 547.48,332.48 575,360 v1(580,360)
RA_3: U7.28 U11.9 | length 802.2
  Top Layer w8: v1(630,355) 630,407.63 580,457.63 580,795 641.61,856.61 U11.9
  Bottom Layer w8: v1(630,355) 704.96,280.04 U7.28
RA_4: U7.26 U11.10 | length 855.3
  Top Layer w8: v1(700,345) 700,360.25 596,464.25 596,771 656.02,831.02 U11.10
  Bottom Layer w8: v1(700,345) 760,285 820,285 862.44,242.56 U7.26
RA_5: U7.24 U11.11 | length 926.5
  Top Layer w8: U11.11 660.43,805.43 612,757 612,470.88 697.69,385.2 719.8,385.2 v1(770,335)
  Bottom Layer w8: v1(770,335) 801.82,335 837.82,299 924.82,299 U7.24
RA_6: U7.22 U11.12 | length 1074.9
  Top Layer w8: U11.12 664.84,779.84 628,743 628,477.51 700.51,405 780,405 840,345 v1(830,345)
  Bottom Layer w8: v1(830,345) 860,315 1110,315 1177.4,247.6 U7.22
RA_7: U7.20 U11.13 | length 1126.7
  Top Layer w8: U11.13 676.62,754.25 644,721.63 644,486 708.43,421.57 813.43,421.57 v1(880,355)
  Bottom Layer w8: v1(880,355) 886,349 1189.78,349 U7.20
RA_8: U7.18 U11.14 | length 1228.4
  Top Layer w8: U11.14 673.66,728.66 660,715 660,497.57 720,437.57 852.2,437.57 v1(884.76,405)
  Bottom Layer w8: v1(884.76,405) 934.76,365 1331.26,365 U7.18
RB_1: U8.32 U12.15 | length 1000.5
  Top Layer w8: U12.15 1353.66,461.34 1550,265 1908.9,265 U8.32
RB_2: U8.30 U12.16 | length 1152.4
  Top Layer w8: U12.16 1379.25,470.75 1555,295 v1(1730,295)
  Bottom Layer w8: v1(1730,295) 1830,295 1860,265 2110,265 2127.48,247.52 U8.30
RB_3: U8.28 U12.17 | length 1286.1
  Top Layer w8: U12.17 1404.84,480.16 1562,323 v1(1678,323)
  Bottom Layer w8: v1(1678,323) 1852,323 1890,285 2180,285 2190,275 2270,275 2284.96,260.04 U8.28
RB_4: U8.26 U12.18 | length 1413.5
  Top Layer w8: U12.18 1430.43,494.57 1575,350 1735,350 v1(1730,355)
  Bottom Layer w8: v1(1730,355) 1850,355 1894,311 2204,311 2220,295 2300,295 2330,265 2420,265 2442.44,242.56 U8.26
RB_5: U8.24 U12.19 | length 1505.6
  Top Layer w8: U12.19 1456.02,503.98 1578,382 v1(1823,382)
  Bottom Layer w8: v1(1823,382) 1826,385 1860,385 1918,327 2294,327 2340,281 2522.82,281 U8.24
RB_6: U8.22 U12.20 | length 1649.2
  Top Layer w8: U12.20 1481.61,523.39 1596,409 1880,409 1924,365 v1(1930,365)
  Bottom Layer w8: v1(1930,365) 1938,357 2290,357 2350,297 2548,297 2580,265 2740,265 2757.4,247.6 U8.22
RB_7: U8.20 U12.21 | length 1762.4
  Top Layer w8: U12.21 1507.2,537.8 1620,425 1950,425 v1(1980,395)
  Bottom Layer w8: v1(1980,395) 1994,381 2302,381 2370,313 2554.63,313 2582.63,285 2860,285 2914.88,230.12 U8.20
RB_8: U8.18 U12.22 | length 1873.4
  Top Layer w8: U12.22 1532.8,547.2 1635,445 2010,445 v1(2030,425)
  Bottom Layer w8: v1(2030,425) 2058,397 2308.63,397 2370.63,335 2580,335 2614,301 2866.63,301 2881.37,286.26 2990,286.26 U8.18
RC_1: U9.32 U14.7 | length 1173.8
  Top Layer w8: v1(3565,365) 3556.82,365 3635.82,444 3849,444 3878.25,473.25 3915.88,473.25 3916.13,473 3930,473 3970,513 3970,755.51 4132.29,917.8 U14.7
  Bottom Layer w8: U9.32 3550,350 v1(3565,365)
RC_2: U9.30 U14.8 | length 1111.4
  Top Layer w8: v1(3630,355) 3630,358 3700,428 3880,428 3909.25,457.25 3909.5,457 3950,457 3990,497 3990,752.88 4129.32,892.2 U14.8
  Bottom Layer w8: v1(3630,355) 3630,310 3707.48,232.52 U9.30
RC_3: U9.28 U14.9 | length 1100.8
  Top Layer w8: v1(3700,355) 3705,355 3762,412 3888.56,412 3917.56,441 3970,441 4010,481 4010,750.25 4126.36,866.61 U14.9
  Bottom Layer w8: v1(3700,355) 3700,327.5 3760,267.5 3807.5,267.5 3864.96,210.04 U9.28
RC_4: U9.26 U14.10 | length 1079
  Top Layer w8: v1(3775,360) 3810,395 3810,396 3895.19,396 3924.19,425 3990,425 4026,461 4026,731 4136.02,841.02 U14.10
  Bottom Layer w8: v1(3775,360) 3850,285 3941.34,285 U9.26
RC_5: U9.24 U14.11 | length 1080.3
  Top Layer w8: v1(3855,360) 3860,360 3880,380 3901.82,380 3930.82,409 4007,409 4044.8,446.8 4042,449.61 4042,724.37 4133.06,815.43 U14.11 ; U14.11@4194.13,810.7 U14.11@4198.86,815.43
  Bottom Layer w8: v1(3855,360) 3914,301 3947.97,301 3983.97,265 4118.82,265 U9.24
RC_6: U9.22 U14.12 | length 1100.5
  Top Layer w8: v1(3923.41,355) 3923.41,363.41 3953,393 4013.63,393 4060.8,440.18 4060.8,620.32 4060,621.12 4060,719.75 4130.1,789.84 U14.12 ; U14.12@4194.13,785.11 U14.12@4198.86,789.84
  Bottom Layer w8: v1(3923.41,355) 3920,351.59 3990.59,281 4260.3,281 U9.22
RC_7: U9.20 U14.13 | length 1095.9
  Top Layer w8: v1(4000,360) 4003.25,360 4076.8,433.55 4076.8,654.2 4076,655 4076,713.12 4127.13,764.25 U14.13 ; U14.13@4194.13,759.52 U14.13@4198.86,764.25
  Bottom Layer w8: v1(4000,360) 4000,337 4040,297 4266.93,297 4295.15,268.78 4430,268.78 U9.20
RC_8: U9.18 U14.14 | length 1098.4
  Top Layer w8: v1(4080,360) 4080,405 4092.8,417.8 4092.8,662.2 4092,663 4092,706.49 4124.17,738.66 U14.14
  Bottom Layer w8: v1(4080,360) 4080,353 4120,313 4273.55,313 4301.77,284.78 4571.48,284.78 U9.18
RD_1: U10.32 U15.15 | length 548.3
  Top Layer w8: U15.15 5073.66,370 5130,313.66 U10.32
RD_2: U10.30 U15.16 | length 616.8
  Top Layer w8: U15.16 5099.25,392.13 5240,251.38 5263.62,251.38 5287.48,227.52 U10.30
RD_3: U10.28 U15.17 | length 735.2
  Top Layer w8: U15.17 5124.84,417.53 5272.03,270.34 5404.66,270.34 5444.96,230.04 U10.28
RD_4: U10.26 U15.18 | length 844.8
  Top Layer w8: U15.18 5150.43,429.57 5293.66,286.34 5520,286.34 U10.26
RD_5: U10.24 U15.19 | length 991
  Top Layer w8: U15.19 5176.02,436.32 5310,302.34 5547.66,302.34 5586.18,263.82 5731.18,263.82 5759.92,235.08 U10.24
RD_6: U10.22 U15.20 | length 1098.5
  Top Layer w8: U15.20 5201.61,446.72 5330,318.34 5556.48,318.34 5594.82,280 5841.3,280 U10.22
RD_7: U10.20 U15.21 | length 1248.4
  Top Layer w8: U15.21 5227.2,457.13 5350,334.34 5571.66,334.34 5610,296 5847.93,296 5848.93,295 6025,295 6074.88,245.12 U10.20
RD_8: U10.18 U15.22 | length 1380.5
  Top Layer w8: U15.22 5252.8,462.2 5364.02,350.98 5586.02,350.98 5624,313 5905.33,313 5907.33,315 6165,315 6232.36,247.64 U10.18
SCLK: P1.3 U11.4 U12.4 U13.4 U14.4 U15.4 U16.4 | length 9482.2
  Top Layer w8: v1(470,1155) 550,1075 550,1034.57 600,984.57 U11.4 ; U12.4 1609.57,1094.57 1690,1175 v1(1690,1185) ; v1(2220,515) 2320,615 2320,637 2340.43,657.43 U13.4 ; v1(4050,1065) 4050,1025 4080.43,994.57 U14.4 ; U15.4 5329.57,1037.19 5370,1077.63 v1(5370,1075) ; v1(5730,495) 5750,495 5870,615 5919.63,615 5970.43,665.81 U16.4
  Bottom Layer w8: v1(470,1155) 476,1161 1620,1161 1644,1185 v1(1690,1185) 1730,1145 1730,1117.63 1836,1011.63 1836,758.49 2079.49,515 v1(2220,515) 2370,515 2409.49,554.49 3700,554.49 3804,658.49 3804,968.37 3829.63,994 4021.63,994 4036,1008.37 4036,1051 v1(4050,1065) 4050,1093.63 4097.37,1141 4343.49,1141 4450,1034.49 4450,965 4470,945 5260,945 5355,1040 5355,1060 v1(5370,1075) 5500,945 5610,945 5660,895 5660,525 5690,495 v1(5730,495) 5920.63,495 5976.63,551 6436,551 6540,655 6540,765 P1.3
VCC: C1.2 C2.2 C3.2 C4.2 C5.2 C6.2 C7.2 C8.2 C9.2 C10.2 C11.2 C12.2 C21.1 C22.1 C23.1 I1.2 R19.2 U2.16 U3.1 U3.3 U4.1 U4.3 U5.1 U5.3 U6.1 U6.3 U11.26 U11.28 U12.26 U12.28 U13.26 U13.28 U14.26 U14.28 U15.26 U15.28 U16.26 U16.28 | length 15125.5
  Top Layer w8: v1(450,515) v1@450,515.59 ; U11.26 914.84,1010.16 900,1025 900,1045 916.34,1061.34 U11.28 ; U12.26 1635.16,780.16 1650,795 1670,795 1686.34,778.66 U12.28 1686.34,688.66 1704,671 1726,671 1750,695 1750,765 C3.2 C4.2 1920,815 1950,815 1990,855 1990,955 2017.4,982.4 C6.2 C5.2 2170,1025 2190,1045 2250,1045 2263.66,1031.34 U13.28 2263.66,951.34 2276.83,938.17 2301.67,938.17 2302.42,937.42 2314.84,949.84 U13.26 ; U4.3 2995,790 ; U3.3 2985,1040 2960,1015 2960,965 2985,940 ; v1(3140,675) 3125,690 U4.1 2995,690 2970,715 2970,765 2995,790 ; v1(3230,415) v1@3230,425 ; U6.1@3595,830 U6.1 U6.1@3665,830 ; U6.3 3675,730 3690,745 3690,805 U6.1@3665,830 ; U5.3 U5.3@3665,990 ; U14.26 4384.84,1020.16 4370,1035 4370,1055 4386.34,1071.34 U14.28 4446.34,1071.34 4510,1135 4545.2,1135 4545.39,1135.2 C8.2@4625,1135.2 ; v1@4790,515 v1(4800,515) ; U15.26 5355.16,770.16 5370,785 5390,785 5406.34,768.66 U15.28 5406.34,688.66 v1(5430,665) ; C9.2@5495,730 C9.2 ; C11.2@5785,960 5785,1000 5800,1015 5870,1015 5893.66,991.34 U16.28 5893.66,921.34 5910,905 5930,905 5944.84,919.84 U16.26 ; 2985,940 U3.1 3125,940 3160,975 3510,975 3530,995 3530,1065 3550,1085 3620.51,1085 U5.1 3675,1090 3690,1075 3690,1005 3675,990 U5.3@3665,990 ; 2985,940 2970,925 2970,815 2995,790 ; U6.1@3665,830 3680,845 3680,928.5 3680.82,929.32 3680.82,974.18 U5.3@3665,990
  Top Layer w12: I1.2 337.4,392.4 C22.1 337.4,502.4 360,525 C21.1 v1@450,515.59 ; U11.28 993.34,1061.34 1029.6,1097.6 C1.2 C2.2 1220,1037.6 1220,775 1290,705 v1(1290,515) ; v1(1860,595) 1950,685 1950,785 ; 1920,815 1950,785 ; v1(2170,685) 2050,685 1950,785 ; v1@3230,425 3190,465 C23.1 3137.4,502.4 3155,520 U2.16 ; C8.2 4667.4,1137.6 4760,1045 4760,545 v1@4790,515 ; v1(5430,665) C9.2@5495,730 ; C9.2 C10.2 5609,730 5640,761 5640,835 5631.53,843.47 5631.53,936.53 5655,960 C12.2 C11.2@5785,960 ; v1(6320,405) 6372.6,352.4 R19.2
  Bottom Layer w8: v1@3130,685 v1(3140,675)
  Bottom Layer w12: v1(450,515) v1(1290,515) 1780,515 v1(1860,595) 1920,595 2100,415 4743.5,415 4800,471.5 v1(4800,515) 5280,515 ; v1(2170,685) v1@3130,685 ; v1(5430,665) 5280,515 ; v1(6320,405) 5690,405 5580,515 5280,515
XLAT: P1.6 U11.3 U12.3 U13.3 U14.3 U15.3 U16.3 | length 9789.7
  Top Layer w8: v1(500,1265) 500,1203.18 580,1123.18 580,1050.16 620,1010.16 U11.3 ; U12.3 1635.16,1090.16 1770,1225 v1(1770,1235) ; v1(2260,605) 2260,623 2314.84,677.84 U13.3 ; v1(4000,1155) 4077,1078 4077,1038 4094.84,1020.16 U14.3 ; U15.3 5355.16,1021.97 5440,1106.82 v1(5440,1115) ; v1(5760,575) 5820,635 5910,635 5944.84,669.84 U16.3
  Bottom Layer w8: v1(500,1265) 650,1265 706,1209 1550,1209 1623,1282 1721.18,1282 1730,1273.18 1731.82,1273.18 v1(1770,1235) 1770,1225 1820,1175 1820,1097.63 1884,1033.63 1884,778.37 2057.37,605 v1(2260,605) 2270,615 3692.63,615 3756,678.37 3756,1055 3856,1155 v1(4000,1155) 4034,1189 4363.37,1189 4547.37,1005 5237.37,1005 5298,1065.63 5298,1151.82 5296,1153.82 5296,1171 5320,1195 5360,1195 v1(5440,1115) 5550,1005 5620,1005 5711.31,913.69 5711.31,613.69 5750,575 v1(5760,575) 5816,575 5840,599 6396,599 6488,691 6488,821.63 6528,861.63 6528,1053 P1.6
pads on no net: U11.23 U12.23 U13.23 U14.23 U15.23 U16.23

## Polygon pours and split planes (outlines as drawn)
GND on Top Layer "Top Layer-GND" (solid, pour order 4): 0,0 0,1575 6710,1575 6710,0
GND on Bottom Layer "Bottom Layer-GND" (solid, pour order 6): 0,0 0,1575 6710,1575 6710,0

## Keep-outs
Keep-Out Layer:
  the board outline again, w10

## Other copper
Bottom Layer:
  pour cut-out: 5100,885 5100,805 5380,805 5380,885
  pour cut-out: 5100,885 5090,885 5090,795 5100,795

## Silkscreen, mask and mechanical layers (free items; w line width, h text height)
Top Overlay:
  text "CBIT2" at 160,1235 h60
  text "BLANK" at 6414.63,1225 h60
  text "CBIT1" at 160,1135 h60
  text "XLAT" at 6440.99,1115 h60
  text "CBIT0" at 160,1035 h60
  text "MODE" at 6430,1015 h60
  text "COE" at 160,925 h60
  text "GSCLK" at 6414.02,915 h60
  text "ROW_IN" at 30,825 h60
  text "SCLK" at 6436.83,815 h60
  text "MOSI" at 6440.49,715 h60
  text "MISO" at 6440.16,615 h60
  text "COL_IN" at 6550,525 h60
  text "GND" at 170,455 h60 r270
  text "VCC" at 170,335 h60 r270
  text "LEDMatrix" at 5560,45 h120
  text "v1.0T" at 5900,45 h50
  text "BY solosky@772.com" at 6070,45 h60
Mechanical 5:
  lines w10: 770,-2995 800,-2995
Mechanical 11:
  rectangle: 0,0 6710,1575
  lines w10: 0,0 0,1575 6710,1575 6710,10 6700,0 0,0

## Dimensions
-115,1575 to -55,-5 on Mechanical 1